# Altium PCB power.PcbDoc
Units mil, origin at the board's own origin, x right, y up, seen from the top; angles counter-clockwise.
Board outline 1417.32 x 1417.32 mil, 2 copper layers (Top Layer, Bottom Layer); 11 components, 2 nets, 20 pads, 256 vias.
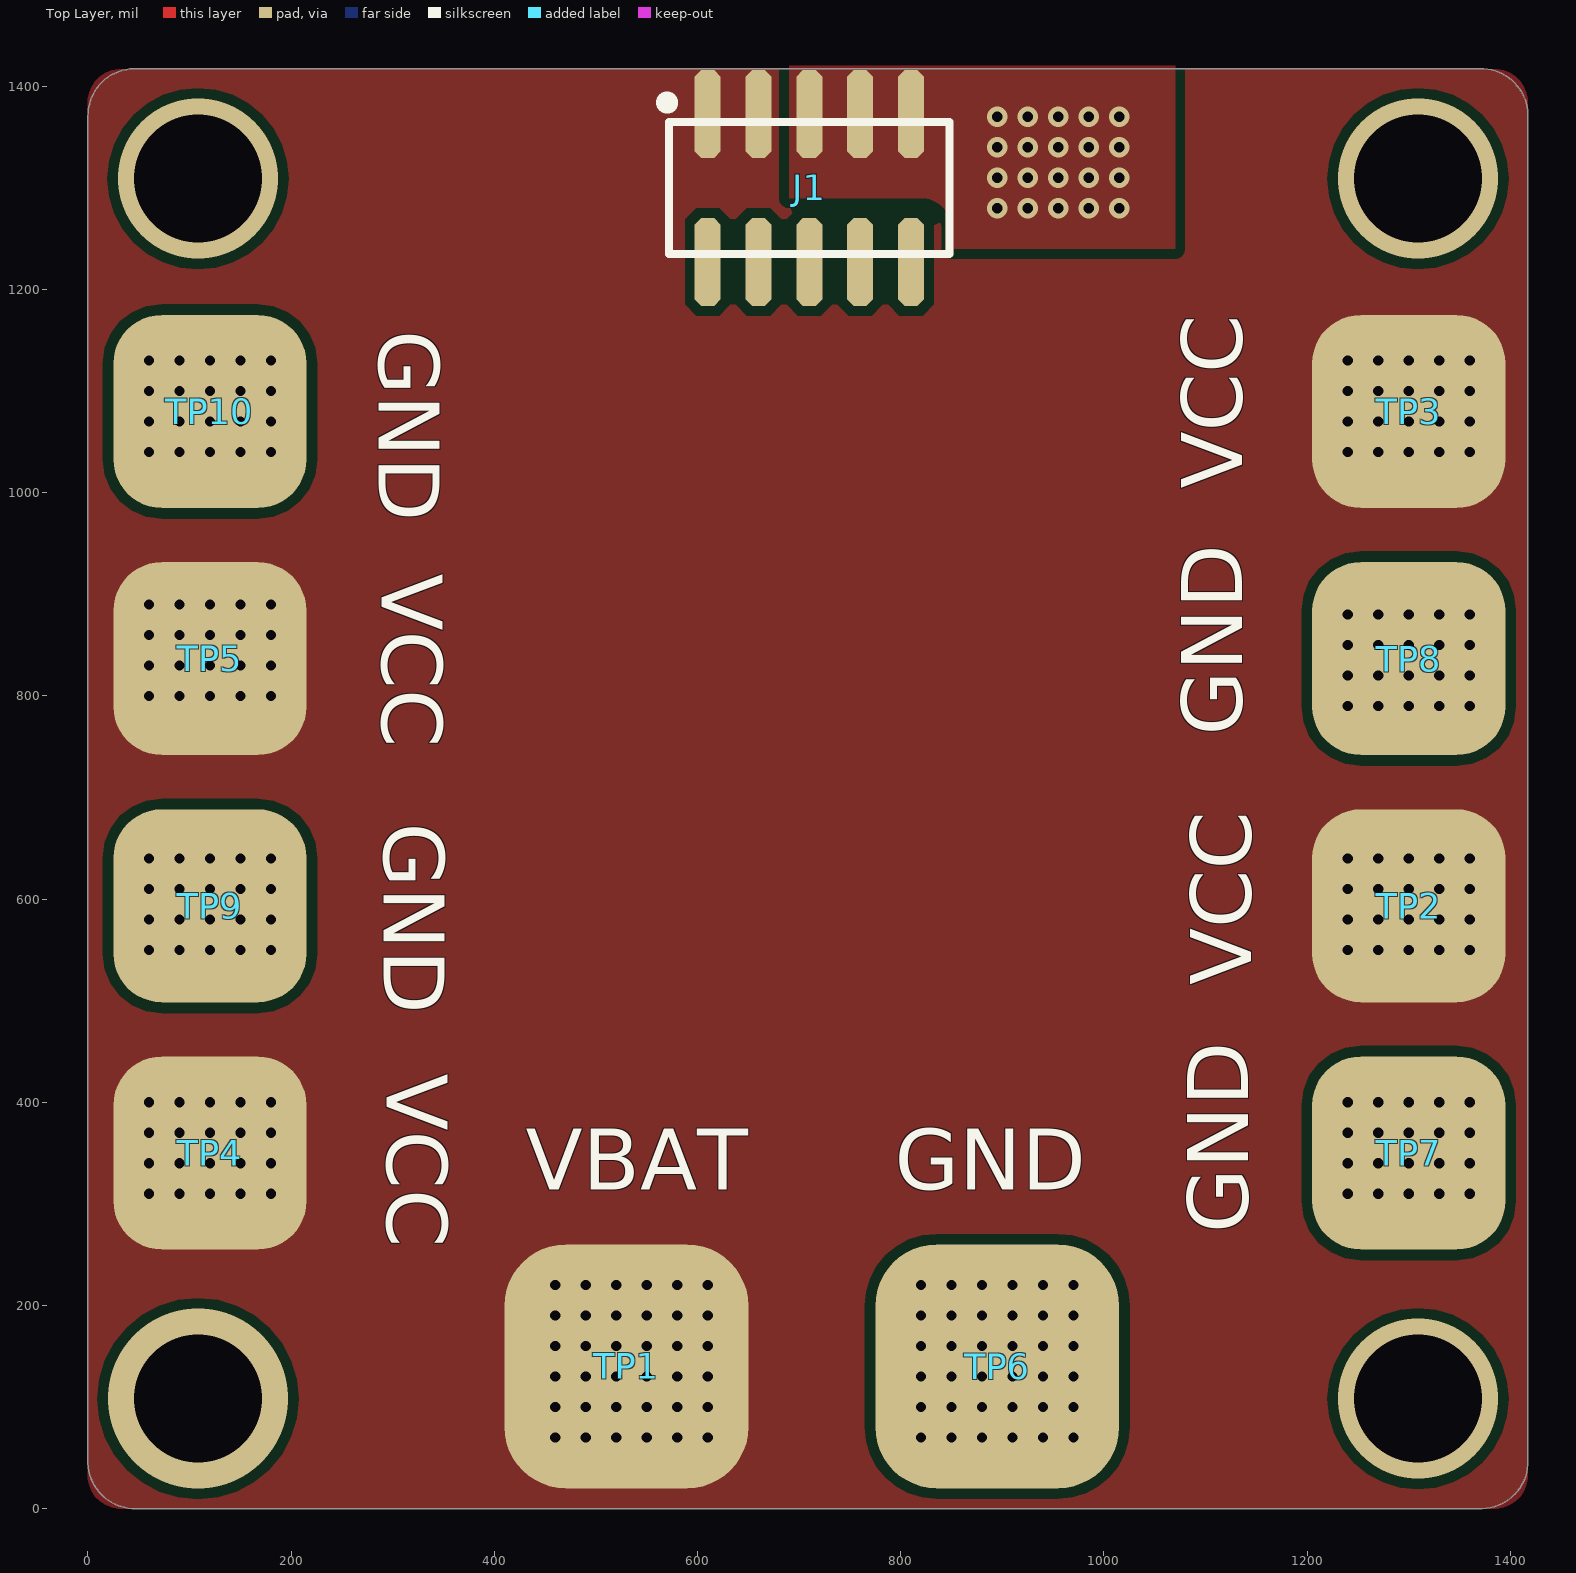
[diagram p0: Top Layer view]
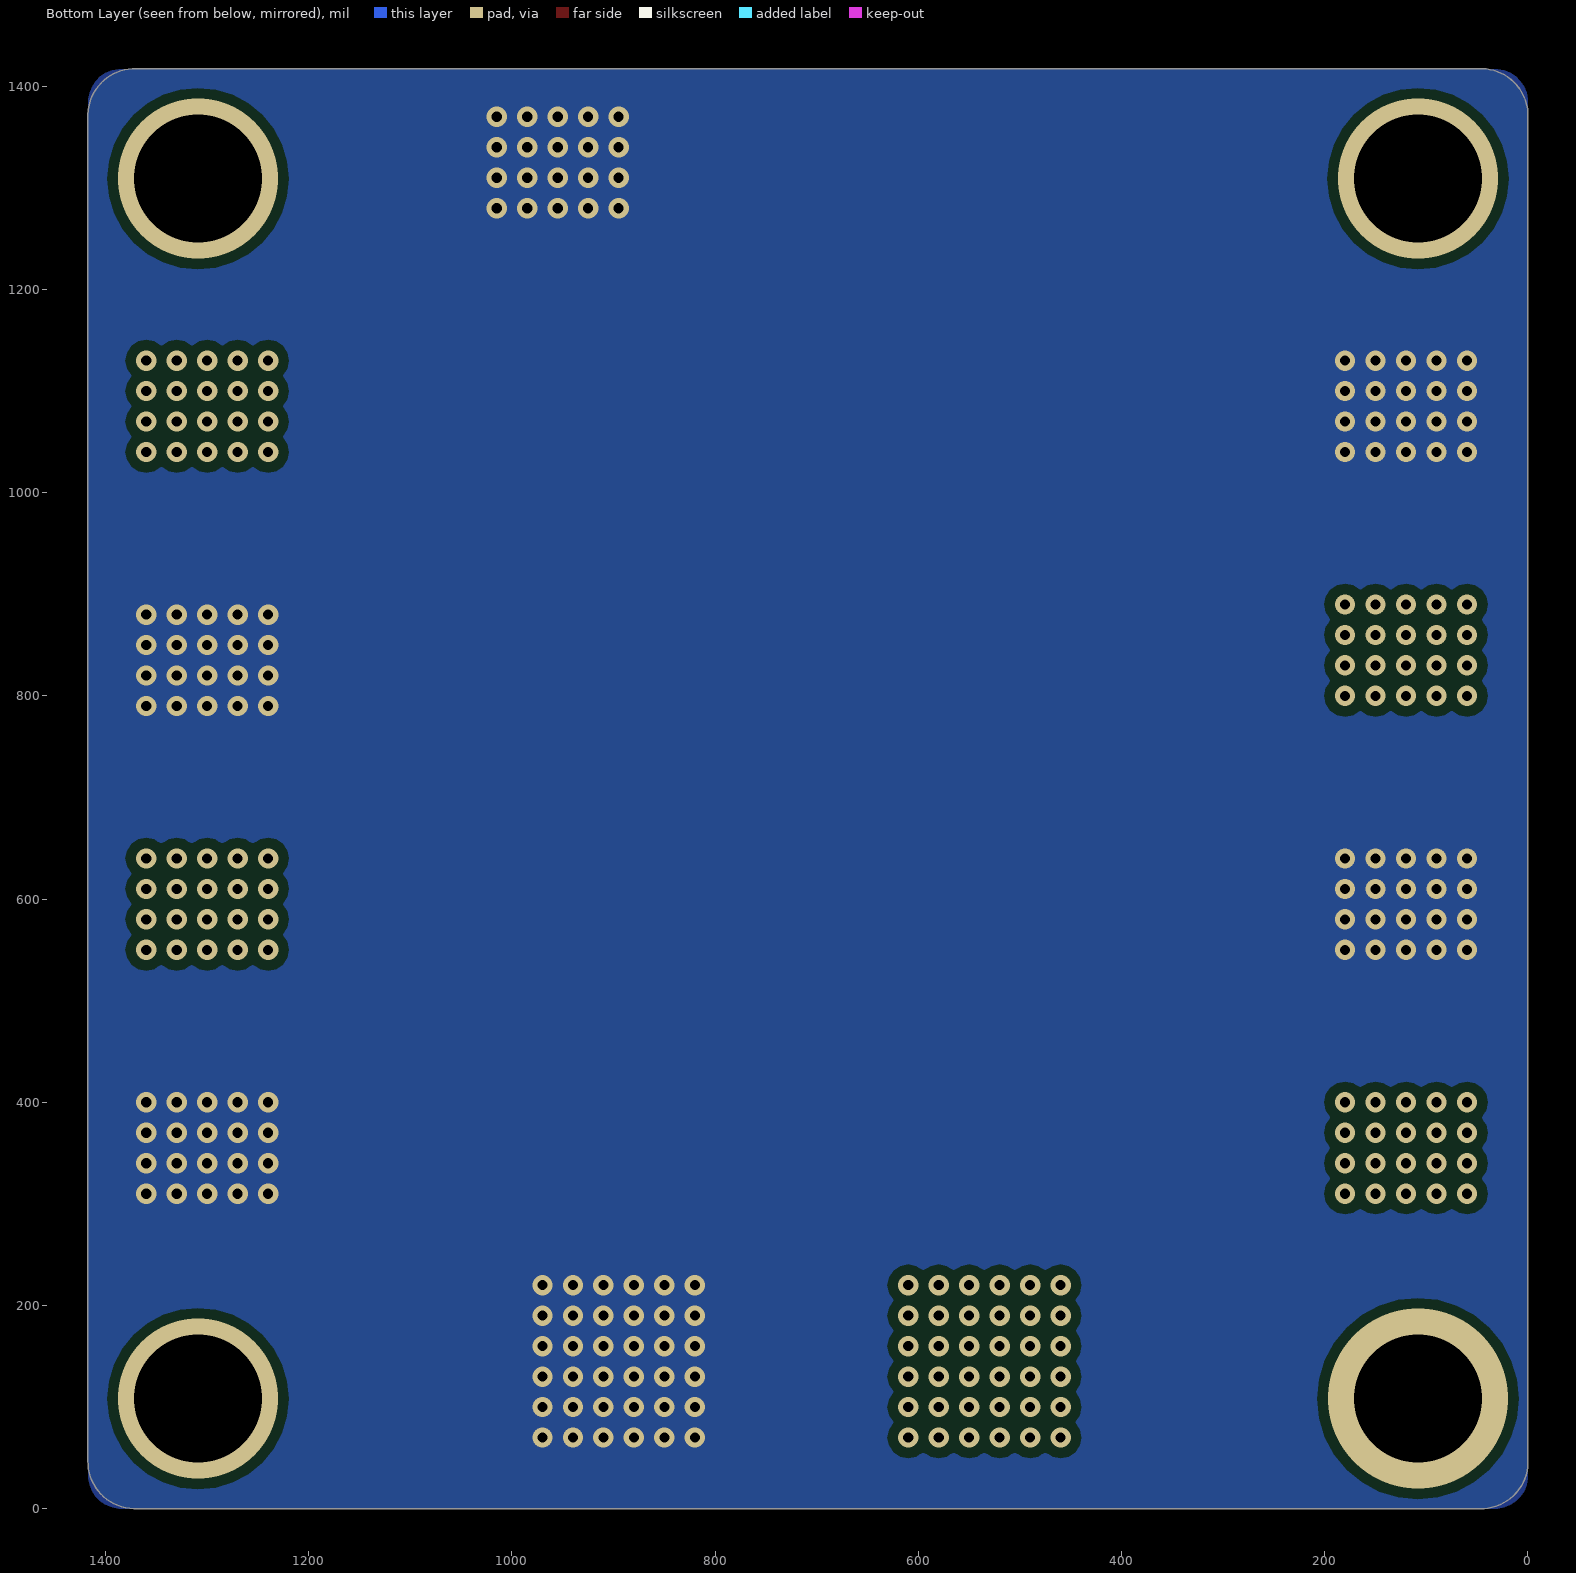
[diagram p1: Bottom Layer view, seen from below]

## Layer stack, top to bottom
Top Solder: solder mask 0.4, Solder Resist, Dk 3.5
Top Layer: signal copper 1.4
Dielectric 1: dielectric 12.6, FR-4, Dk 4.8
Bottom Layer: signal copper 1.4
Bottom Solder: solder mask 0.4, Solder Resist, Dk 3.5

## Board outline
0,307.32 0,1370 cw(c46.16,1371.16) 45,1417.32 1370,1417.32 cw(c1371.16,1371.16) 1417.32,1372.32 1417.32,47.32 cw(c1371.16,46.16) 1372.32,0 47.32,0 cw(c46.16,46.16) 0,45

## Design rules (kind name [scope] priority, off if disabled: settings)
Clearance [All] p1: gap=10 ignorepadtopadclearanceinfootprint=FALSE except(0: Arc-Hole Track-Hole SMDPad-Hole THPad-Hole Via-Hole Fill-Hole Poly-Hole Region-Hole Text-Hole)
PlaneConnect [All] p1: planeconnectstyle=Direct reliefexpansion=20 reliefentries=4 reliefconductorwidth=10 reliefairgap=10
PolygonConnect [All] p1: connectstyle=Direct reliefconductorwidth=10 reliefentries=4 polygonreliefangle="90 Angle" airgapwidth=10
RoutingVias [All] p1: holewidth=15 width=30 viastyle="Through Hole" minholewidth=10 minwidth=20 maxholewidth=28 maxwidth=50
SolderMaskExpansion [All] p1: expansion=4
Width [All] p1: maxlimit=50 minlimit=10 preferedwidth=10
29 further rules are at their usual default settings.

## Components (designator, comment, footprint, x,y, rotation, side; value= is the part's Value field where it differs from the comment)
J1 "power_to_fly" "HDR1.27 2x5-M-SMD" 710,1300 r0 top locked value=Value
TP1 "VBAT" test_2 530,140 r0 top
TP2 "VCC" test_1 1300,593.33 r90 top
TP3 "VCC" test_1 1300,1080 r90 top
TP4 "VCC" test_1 120,350 r90 top
TP5 "VCC" test_1 120,836.67 r90 top
TP6 "GND" test_2 895,140 r0 top
TP7 "GND" test_1 1300,350 r90 top
TP8 "GND" test_1 1300,836.67 r90 top
TP9 "GND" test_1 120,593.33 r90 top
TP10 "GND" test_1 120,1080 r90 top

## Footprints (in the part's own frame and the unit in brackets; to place one, negate y for a bottom-side part, rotate by r counter-clockwise, add the part's x,y. Pads: shape width x height; smd on the part's side, far side on the other; paste and mask are expansions set on the pad)
"HDR1.27 2x5-M-SMD" [mm] "2x5P双排排母，贴片，脚距1.27mm"
  oct 0.65x2.2 smd: 1(-2.54,1.85) 2(-2.54,-1.85) 3(-1.27,1.85) 4(-1.27,-1.85) 5(0,1.85) 6(0,-1.85) 7(1.27,1.85) 8(1.27,-1.85) 9(2.54,1.85) 10(2.54,-1.85)
  silkscreen extent -3.58,-1.65 3.51,2.16, body extent -3.35,-2.1 3.38,2.1, height 4.77
test_1 [mil]
  rrect50% 190x190 smd: 1(0,0)
test_2 [mil]
  rrect50% 240x240 smd: 1(0,0)

## Part data
J1: library part Header_2x5, "2x5P-接插件", Manufacturer_Part_Number=826656-5, Built_By=EMA_UL_Team, C="Copyright (C) 2015 Accelerated Designs. All rights reserved", RefDes=RefDes, Type=DEV, Vendor="TE Connectivity"
TP1 TP2 TP3 TP4 TP5 TP6 TP7 TP8 TP9 TP10: library part TEST, "测试点", BOM名称=测试点, 学习资源=www.ooocke.com, 版权归属=源创客

## Via types
v1: diameter 20, hole 10, Top Layer to Bottom Layer, tented bottom, 232 vias
v2: diameter 20, hole 10, Top Layer to Bottom Layer, tented both sides, 20 vias
v3: diameter 157.48, hole 125.98, Top Layer to Bottom Layer, tented both sides, 3 vias
v4: diameter 177.17, hole 125.98, Top Layer to Bottom Layer, tented both sides, 1 vias

## Nets (pads, with @x,y where several pads share a name; then routed paths per layer and width w, separated by ;. In a path a pad name is that pad's centre, name@x,y a point inside that pad or via, vN(x,y) a via of type N, cw(c..) or ccw(c..) an arc to the next point about the centre after c; other vN are vias at no path point)
GND: J1.5 J1.7 J1.9 TP6.1 TP7.1 TP8.1 TP9.1 TP10.1
  other v1: 820,70 850,70 880,70 910,70 940,70 970,70 820,100 850,100 880,100 910,100 940,100 970,100 820,130 850,130 880,130 910,130 940,130 970,130 820,160 850,160 880,160 910,160 940,160 970,160 820,190 850,190 880,190 910,190 940,190 970,190 820,220 850,220 880,220 910,220 940,220 970,220 1240,310 1270,310 1300,310 1330,310 1360,310 1240,340 1270,340 1300,340 1330,340 1360,340 1240,370 1270,370 1300,370 1330,370 1360,370 1240,400 1270,400 1300,400 1330,400 1360,400 60,550 90,550 120,550 150,550 180,550 60,580 90,580 120,580 150,580 180,580 60,610 90,610 120,610 150,610 180,610 60,640 90,640 120,640 150,640 180,640 1240,790 1270,790 1300,790 1330,790 1360,790 1240,820 1270,820 1300,820 1330,820 1360,820 1240,850 1270,850 1300,850 1330,850 1360,850 1240,880 1270,880 1300,880 1330,880 1360,880 60,1040 90,1040 120,1040 150,1040 180,1040 60,1070 90,1070 120,1070 150,1070 180,1070 60,1100 90,1100 120,1100 150,1100 180,1100 60,1130 90,1130 120,1130 150,1130 180,1130
  other v2: 895,1280 925,1280 955,1280 985,1280 1015,1280 895,1310 925,1310 955,1310 985,1310 1015,1310 895,1340 925,1340 955,1340 985,1340 1015,1340 895,1370 925,1370 955,1370 985,1370 1015,1370
VBAT: J1.1 J1.3 TP1.1 TP2.1 TP3.1 TP4.1 TP5.1
  other v1: 460,70 490,70 520,70 550,70 580,70 610,70 460,100 490,100 520,100 550,100 580,100 610,100 460,130 490,130 520,130 550,130 580,130 610,130 460,160 490,160 520,160 550,160 580,160 610,160 460,190 490,190 520,190 550,190 580,190 610,190 460,220 490,220 520,220 550,220 580,220 610,220 60,310 90,310 120,310 150,310 180,310 60,340 90,340 120,340 150,340 180,340 60,370 90,370 120,370 150,370 180,370 60,400 90,400 120,400 150,400 180,400 1240,550 1270,550 1300,550 1330,550 1360,550 1240,580 1270,580 1300,580 1330,580 1360,580 1240,610 1270,610 1300,610 1330,610 1360,610 1240,640 1270,640 1300,640 1330,640 1360,640 60,800 90,800 120,800 150,800 180,800 60,830 90,830 120,830 150,830 180,830 60,860 90,860 120,860 150,860 180,860 60,890 90,890 120,890 150,890 180,890 1240,1040 1270,1040 1300,1040 1330,1040 1360,1040 1240,1070 1270,1070 1300,1070 1330,1070 1360,1070 1240,1100 1270,1100 1300,1100 1330,1100 1360,1100 1240,1130 1270,1130 1300,1130 1330,1130 1360,1130
pads on no net: J1.2 J1.4 J1.6 J1.8 J1.10
copper on no net:
  other v3: 1309.06,108.27 108.27,1309.06 1309.06,1309.06
  other v4: 108.27,108.27

## Polygon pours and split planes (outlines as drawn)
VBAT on Top Layer "VBAT_L01_P022" (solid, remove dead copper, pour order 22): 1384,1417 cw(c1384,1384) 1417,1384 1417,33 cw(c1384,33) 1384,0 33,0 cw(c33,33) 0,33 0,1384 cw(c33,1384) 33,1417
GND on Top Layer "GND_L01_P020" (solid, remove dead copper, pour order 20): 690,1420 690,1290 820,1290 cw(c820,1260) 850,1260 850,1240 1070,1240 1070,1420
GND on Bottom Layer "GND_L02_P024" (solid, remove dead copper, pour order 24): 1384,1417 cw(c1384,1384) 1417,1384 1417,33 cw(c1384,33) 1384,0 33,0 cw(c33,33) 0,33 0,1384 cw(c33,1384) 33,1417

## Silkscreen, mask and mechanical layers (free items; w line width, h text height)
Mechanical 1:
  lines w10: 0,45 ccw(c46.16,46.16) 47.32,0 1372.32,0 ccw(c1371.16,46.16) 1417.32,47.32 1417.32,305 1417.32,1110 1417.32,1372.32 ccw(c1371.16,1371.16) 1370,1417.32 45,1417.32 ccw(c46.16,1371.16) 0,1370 0,1112.32 0,307.32 0,45